# Altium PCB PCM2706 USB DAC Stick (Rev.5) Panel Single File.PcbDoc
Units mil, origin at the board's own origin, x right, y up, seen from the top; angles counter-clockwise.
Board outline 3937.01 x 3937.01 mil, 2 copper layers (Top Layer, Bottom Layer); 116 components, 0 nets, 372 pads, 80 vias.
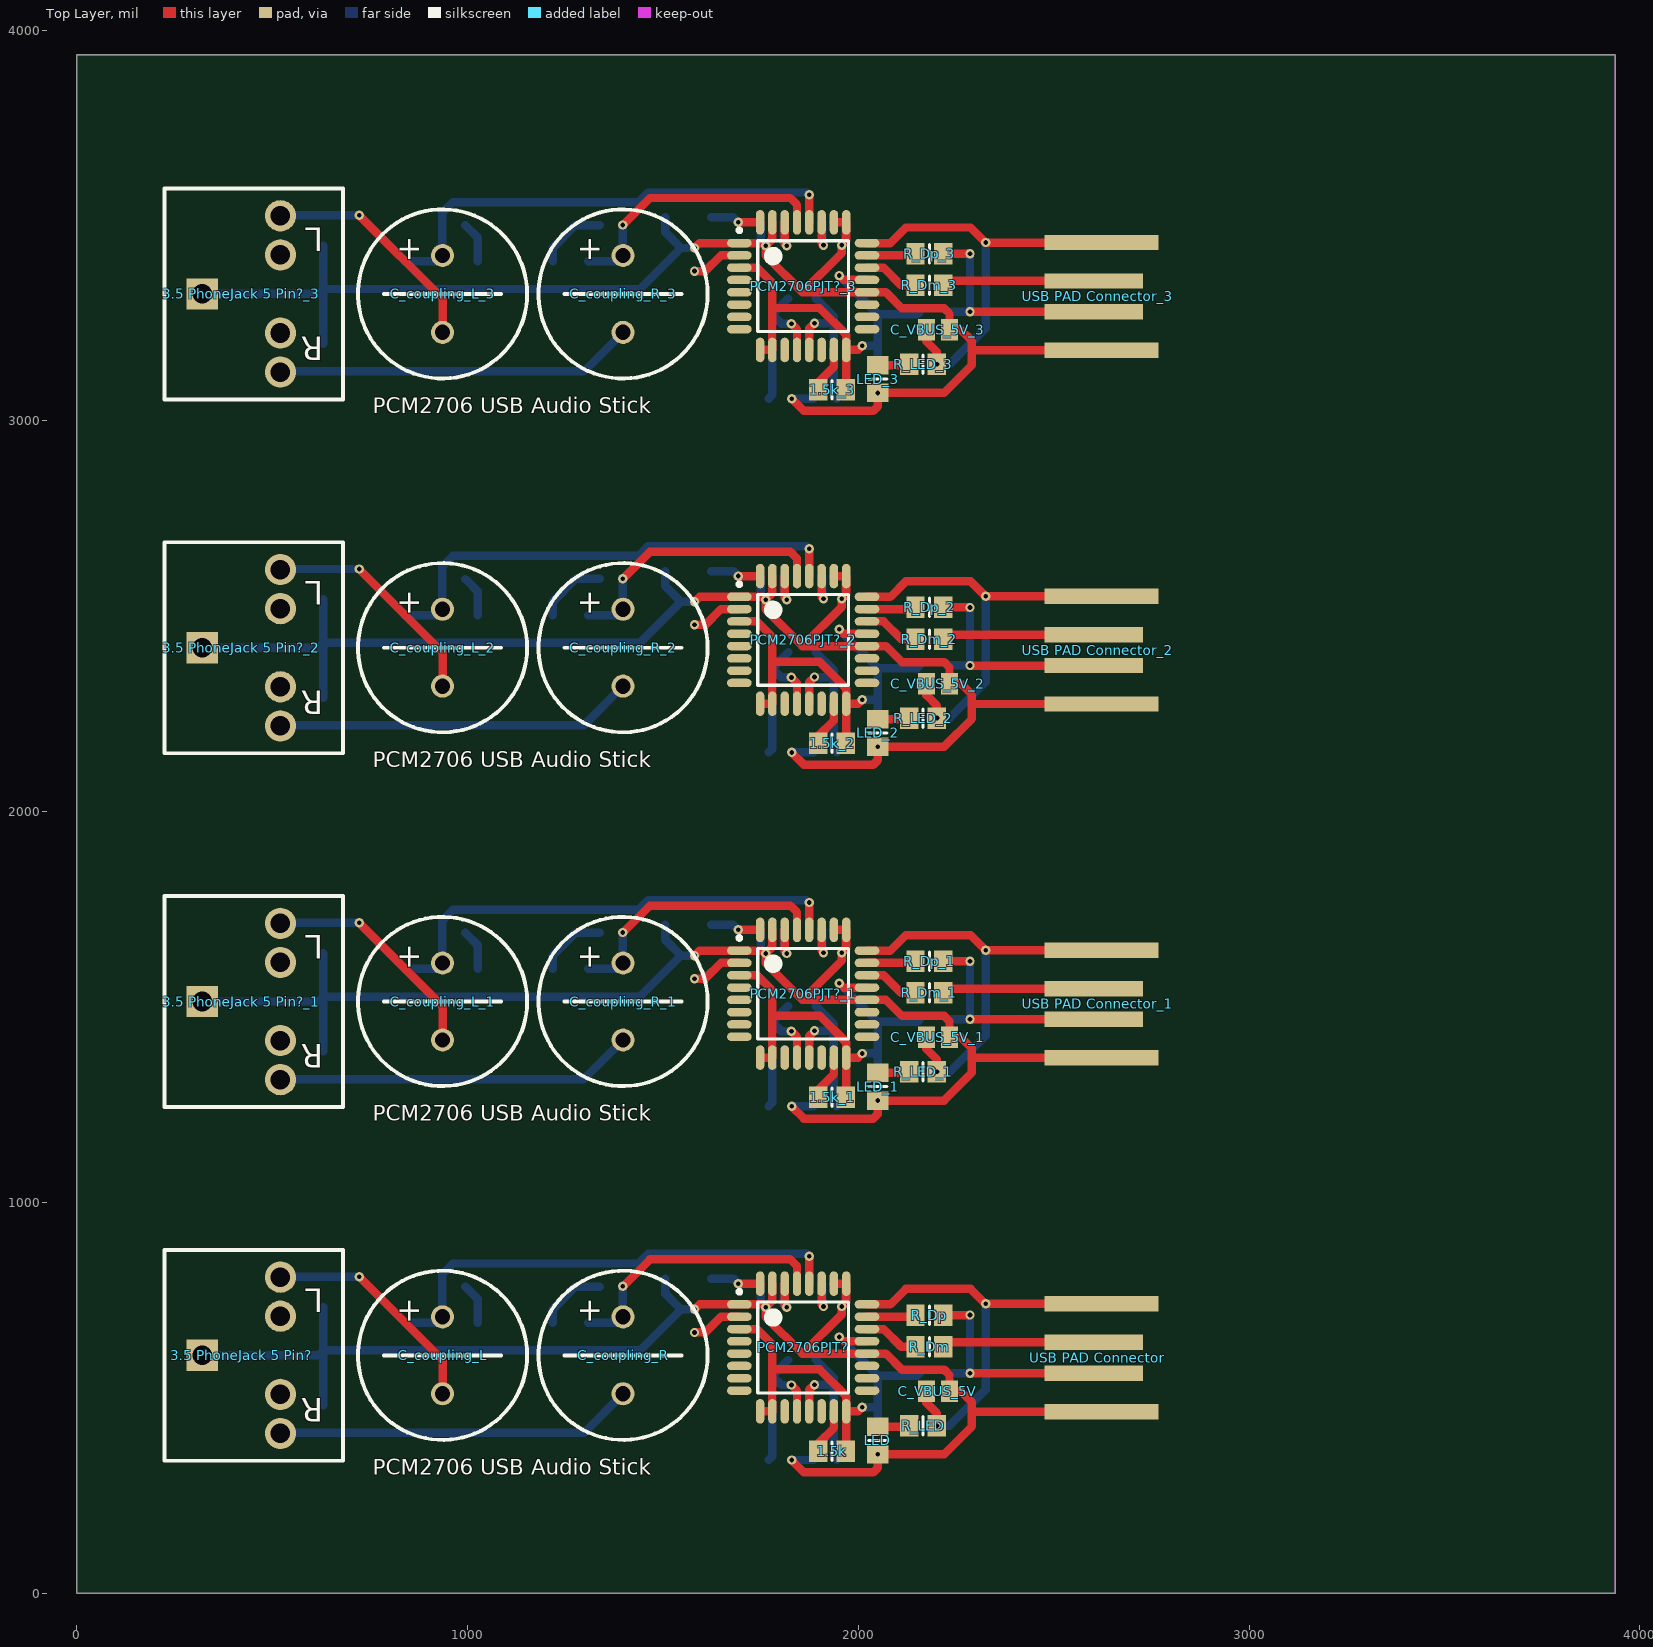
[diagram p0: Top Layer view]
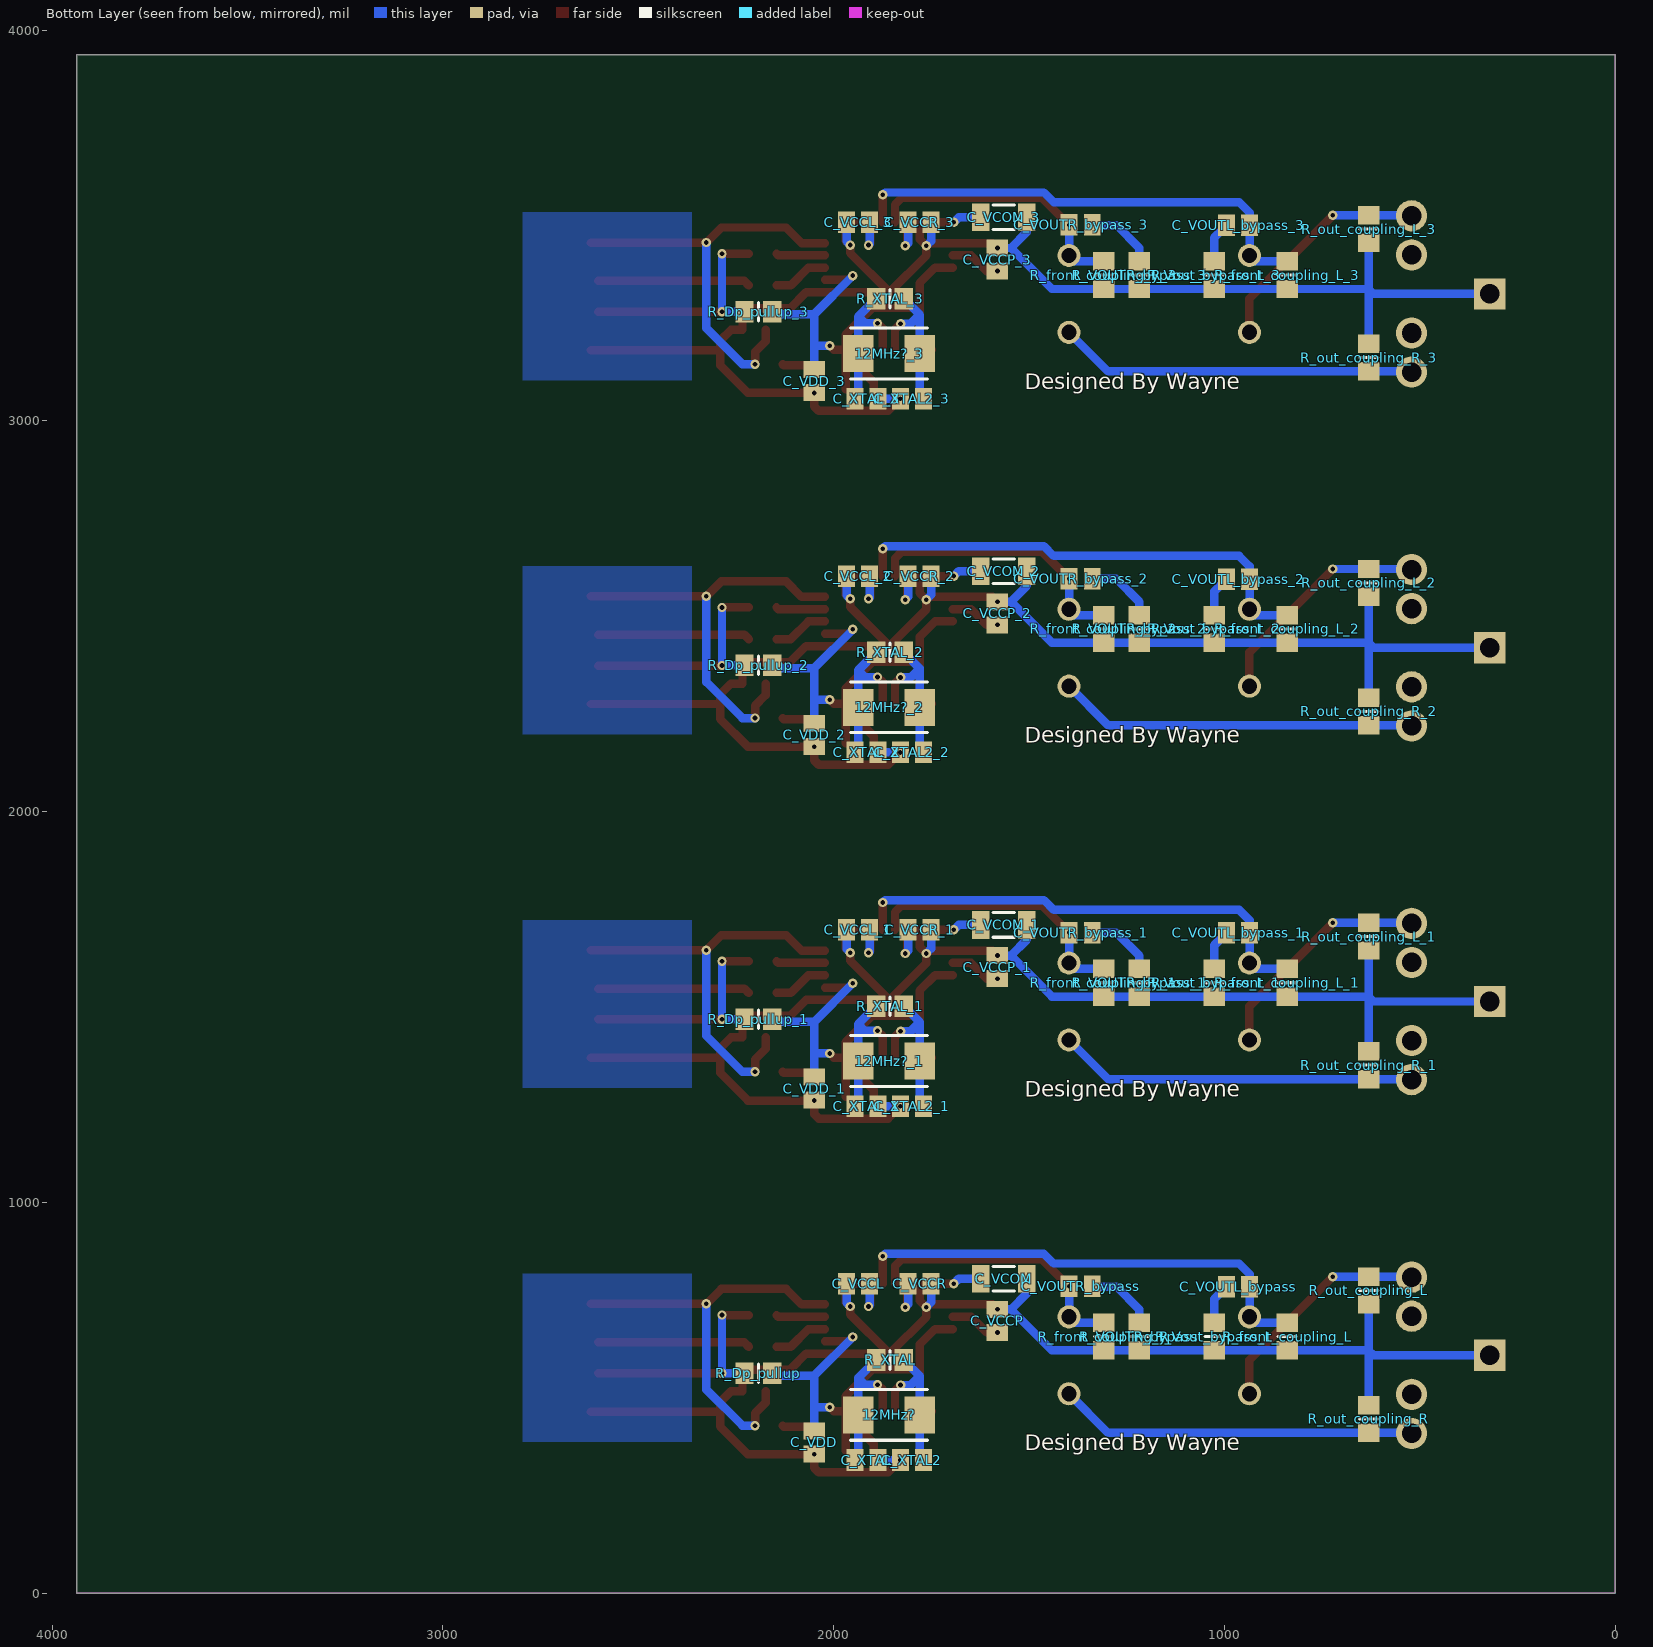
[diagram p1: Bottom Layer view, seen from below]

## Layer stack, top to bottom
Top Layer: signal copper 1.4
Dielectric: dielectric 12.6, FR-4, Dk 4.8
Bottom Layer: signal copper 1.4

## Board outline
0,0 0,3937.01 3937.01,3937.01 3937.01,0

## Design rules (kind name [scope] priority, off if disabled: settings)
Clearance [All] p1: gap=10
PolygonConnect [All] p1: connectstyle=Relief reliefconductorwidth=10 reliefentries=4 polygonreliefangle="90 Angle"
RoutingVias [All] p1: holewidth=28 width=50 viastyle="Through Hole" minholewidth=28 minwidth=50 maxholewidth=28 maxwidth=50
SilkscreenOverComponentPads [All] p1: minsilkscreentomaskgap=10
SolderMaskExpansion [All] p1: expansion=4
Width [All] p1: maxlimit=10 minlimit=10 preferedwidth=10
27 further rules are at their usual default settings.

## Components (designator, comment, footprint, x,y, rotation, side; value= is the part's Value field where it differs from the comment)
1.5k "R_DT_pullup" 6-0805_N 1932.85,363.66 r180 top
1.5k_1 "R_DT_pullup" 6-0805_N 1932.85,1269.17 r180 top (schematic designator 1.5k)
1.5k_2 "R_DT_pullup" 6-0805_N 1932.85,2174.68 r180 top (schematic designator 1.5k)
1.5k_3 "R_DT_pullup" 6-0805_N 1932.85,3080.2 r180 top (schematic designator 1.5k)
"3.5 PhoneJack 5 Pin?" "3.5 PhoneJack 5 Pin" "3.5 PHONEJACK 5 PIN" 320.85,608.66 r180 top
"3.5 PhoneJack 5 Pin?_1" "3.5 PhoneJack 5 Pin" "3.5 PHONEJACK 5 PIN" 320.85,1514.17 r180 top (schematic designator "3.5 PhoneJack 5 Pin?")
"3.5 PhoneJack 5 Pin?_2" "3.5 PhoneJack 5 Pin" "3.5 PHONEJACK 5 PIN" 320.85,2419.68 r180 top (schematic designator "3.5 PhoneJack 5 Pin?")
"3.5 PhoneJack 5 Pin?_3" "3.5 PhoneJack 5 Pin" "3.5 PHONEJACK 5 PIN" 320.85,3325.2 r180 top (schematic designator "3.5 PhoneJack 5 Pin?")
12MHz? "XTAL" CAPM5032X13N 2015.85,550.66 r0 bottom
12MHz?_1 "XTAL" CAPM5032X13N 2015.85,1456.17 r0 bottom (schematic designator 12MHz?)
12MHz?_2 "XTAL" CAPM5032X13N 2015.85,2361.68 r0 bottom (schematic designator 12MHz?)
12MHz?_3 "XTAL" CAPM5032X13N 2015.85,3267.2 r0 bottom (schematic designator 12MHz?)
C_coupling_L "Cap Pol1" "SOLID CAP (D)10MM" 935.85,608.66 r90 top
C_coupling_L_1 "Cap Pol1" "SOLID CAP (D)10MM" 935.85,1514.17 r90 top (schematic designator C_coupling_L)
C_coupling_L_2 "Cap Pol1" "SOLID CAP (D)10MM" 935.85,2419.68 r90 top (schematic designator C_coupling_L)
C_coupling_L_3 "Cap Pol1" "SOLID CAP (D)10MM" 935.85,3325.2 r90 top (schematic designator C_coupling_L)
C_coupling_R "Cap Pol1" "SOLID CAP (D)10MM" 1397.85,608.66 r90 top
C_coupling_R_1 "Cap Pol1" "SOLID CAP (D)10MM" 1397.85,1514.17 r90 top (schematic designator C_coupling_R)
C_coupling_R_2 "Cap Pol1" "SOLID CAP (D)10MM" 1397.85,2419.68 r90 top (schematic designator C_coupling_R)
C_coupling_R_3 "Cap Pol1" "SOLID CAP (D)10MM" 1397.85,3325.2 r90 top (schematic designator C_coupling_R)
C_VBUS_5V "" C0805 2203.85,516.66 r0 top
C_VBUS_5V_1 "" C0805 2203.85,1422.17 r0 top (schematic designator C_VBUS_5V)
C_VBUS_5V_2 "" C0805 2203.85,2327.68 r0 top (schematic designator C_VBUS_5V)
C_VBUS_5V_3 "" C0805 2203.85,3233.2 r0 top (schematic designator C_VBUS_5V)
C_VCCL "" C0805 1937.59,792.05 r0 bottom
C_VCCL_1 "" C0805 1937.59,1697.56 r0 bottom (schematic designator C_VCCL)
C_VCCL_2 "" C0805 1937.59,2603.07 r0 bottom (schematic designator C_VCCL)
C_VCCL_3 "" C0805 1937.59,3508.58 r0 bottom (schematic designator C_VCCL)
C_VCCP "" C0805 1580.85,696.66 r90 bottom
C_VCCP_1 "" C0805 1580.85,1602.17 r90 bottom (schematic designator C_VCCP)
C_VCCP_2 "" C0805 1580.85,2507.68 r90 bottom (schematic designator C_VCCP)
C_VCCP_3 "" C0805 1580.85,3413.2 r90 bottom (schematic designator C_VCCP)
C_VCCR "" C0805 1780.11,792.05 r180 bottom
C_VCCR_1 "" C0805 1780.11,1697.56 r180 bottom (schematic designator C_VCCR)
C_VCCR_2 "" C0805 1780.11,2603.07 r180 bottom (schematic designator C_VCCR)
C_VCCR_3 "" C0805 1780.11,3508.58 r180 bottom (schematic designator C_VCCR)
C_VCOM "" CAPC3216X12N 1564.85,804.66 r180 bottom
C_VCOM_1 "" CAPC3216X12N 1564.85,1710.17 r180 bottom (schematic designator C_VCOM)
C_VCOM_2 "" CAPC3216X12N 1564.85,2615.68 r180 bottom (schematic designator C_VCOM)
C_VCOM_3 "" CAPC3216X12N 1564.85,3521.2 r180 bottom (schematic designator C_VCOM)
C_VDD "" C0805 2049.85,385.66 r270 bottom
C_VDD_1 "" C0805 2049.85,1291.17 r270 bottom (schematic designator C_VDD)
C_VDD_2 "" C0805 2049.85,2196.68 r270 bottom (schematic designator C_VDD)
C_VDD_3 "" C0805 2049.85,3102.2 r270 bottom (schematic designator C_VDD)
C_VOUTL_bypass "" C0805 964.85,784.22 r0 bottom
C_VOUTL_bypass_1 "" C0805 964.85,1689.73 r0 bottom (schematic designator C_VOUTL_bypass)
C_VOUTL_bypass_2 "" C0805 964.85,2595.24 r0 bottom (schematic designator C_VOUTL_bypass)
C_VOUTL_bypass_3 "" C0805 964.85,3500.76 r0 bottom (schematic designator C_VOUTL_bypass)
C_VOUTR_bypass "" C0805 1367.85,785.22 r180 bottom
C_VOUTR_bypass_1 "" C0805 1367.85,1690.73 r180 bottom (schematic designator C_VOUTR_bypass)
C_VOUTR_bypass_2 "" C0805 1367.85,2596.24 r180 bottom (schematic designator C_VOUTR_bypass)
C_VOUTR_bypass_3 "" C0805 1367.85,3501.76 r180 bottom (schematic designator C_VOUTR_bypass)
C_XTAL "" C0805 1915.85,340.66 r180 bottom
C_XTAL2 "" C0805 1799.85,340.66 r0 bottom
C_XTAL2_1 "" C0805 1799.85,1246.17 r0 bottom (schematic designator C_XTAL2)
C_XTAL2_2 "" C0805 1799.85,2151.68 r0 bottom (schematic designator C_XTAL2)
C_XTAL2_3 "" C0805 1799.85,3057.2 r0 bottom (schematic designator C_XTAL2)
C_XTAL_1 "" C0805 1915.85,1246.17 r180 bottom (schematic designator C_XTAL)
C_XTAL_2 "" C0805 1915.85,2151.68 r180 bottom (schematic designator C_XTAL)
C_XTAL_3 "" C0805 1915.85,3057.2 r180 bottom (schematic designator C_XTAL)
LED "" 6-0805_N 2049.85,390.66 r270 top
LED_1 "" 6-0805_N 2049.85,1296.17 r270 top (schematic designator LED)
LED_2 "" 6-0805_N 2049.85,2201.68 r270 top (schematic designator LED)
LED_3 "" 6-0805_N 2049.85,3107.2 r270 top (schematic designator LED)
PCM2706PJT? "PCM2706PJT" TQFP80P900X900X120-32N 1858.85,628.66 r0 top
PCM2706PJT?_1 "PCM2706PJT" TQFP80P900X900X120-32N 1858.85,1534.17 r0 top (schematic designator PCM2706PJT?)
PCM2706PJT?_2 "PCM2706PJT" TQFP80P900X900X120-32N 1858.85,2439.68 r0 top (schematic designator PCM2706PJT?)
PCM2706PJT?_3 "PCM2706PJT" TQFP80P900X900X120-32N 1858.85,3345.2 r0 top (schematic designator PCM2706PJT?)
R_Dm "22" 6-0805_N 2181.85,630.66 r180 top
R_Dm_1 "22" 6-0805_N 2181.85,1536.17 r180 top (schematic designator R_Dm)
R_Dm_2 "22" 6-0805_N 2181.85,2441.68 r180 top (schematic designator R_Dm)
R_Dm_3 "22" 6-0805_N 2181.85,3347.2 r180 top (schematic designator R_Dm)
R_Dp "22" 6-0805_N 2181.85,711.66 r180 top
R_Dp_1 "22" 6-0805_N 2181.85,1617.17 r180 top (schematic designator R_Dp)
R_Dp_2 "22" 6-0805_N 2181.85,2522.68 r180 top (schematic designator R_Dp)
R_Dp_3 "22" 6-0805_N 2181.85,3428.2 r180 top (schematic designator R_Dp)
R_Dp_pullup "1.5k" 6-0805_N 2192.85,563.2 r0 bottom
R_Dp_pullup_1 "1.5k" 6-0805_N 2192.85,1468.72 r0 bottom (schematic designator R_Dp_pullup)
R_Dp_pullup_2 "1.5k" 6-0805_N 2192.85,2374.23 r0 bottom (schematic designator R_Dp_pullup)
R_Dp_pullup_3 "1.5k" 6-0805_N 2192.85,3279.74 r0 bottom (schematic designator R_Dp_pullup)
R_front_coupling_L "3.3k" 6-0805_N 838.85,656.66 r90 bottom
R_front_coupling_L_1 "3.3k" 6-0805_N 838.85,1562.17 r90 bottom (schematic designator R_front_coupling_L)
R_front_coupling_L_2 "3.3k" 6-0805_N 838.85,2467.68 r90 bottom (schematic designator R_front_coupling_L)
R_front_coupling_L_3 "3.3k" 6-0805_N 838.85,3373.2 r90 bottom (schematic designator R_front_coupling_L)
R_front_coupling_R "3.3k" 6-0805_N 1308.85,656.66 r90 bottom
R_front_coupling_R_1 "3.3k" 6-0805_N 1308.85,1562.17 r90 bottom (schematic designator R_front_coupling_R)
R_front_coupling_R_2 "3.3k" 6-0805_N 1308.85,2467.68 r90 bottom (schematic designator R_front_coupling_R)
R_front_coupling_R_3 "3.3k" 6-0805_N 1308.85,3373.2 r90 bottom (schematic designator R_front_coupling_R)
R_LED "330" 6-0805_N 2165.85,428.66 r180 top
R_LED_1 "330" 6-0805_N 2165.85,1334.17 r180 top (schematic designator R_LED)
R_LED_2 "330" 6-0805_N 2165.85,2239.68 r180 top (schematic designator R_LED)
R_LED_3 "330" 6-0805_N 2165.85,3145.2 r180 top (schematic designator R_LED)
R_out_coupling_L "3.3k" 6-0805_N 630.85,774.66 r90 bottom
R_out_coupling_L_1 "3.3k" 6-0805_N 630.85,1680.17 r90 bottom (schematic designator R_out_coupling_L)
R_out_coupling_L_2 "3.3k" 6-0805_N 630.85,2585.68 r90 bottom (schematic designator R_out_coupling_L)
R_out_coupling_L_3 "3.3k" 6-0805_N 630.85,3491.2 r90 bottom (schematic designator R_out_coupling_L)
R_out_coupling_R "3.3k" 6-0805_N 630.85,445.66 r270 bottom
R_out_coupling_R_1 "3.3k" 6-0805_N 630.85,1351.17 r270 bottom (schematic designator R_out_coupling_R)
R_out_coupling_R_2 "3.3k" 6-0805_N 630.85,2256.68 r270 bottom (schematic designator R_out_coupling_R)
R_out_coupling_R_3 "3.3k" 6-0805_N 630.85,3162.2 r270 bottom (schematic designator R_out_coupling_R)
R_Vout_bypass_L "16" 6-0805_N 1025.85,656.66 r270 bottom
R_Vout_bypass_L_1 "16" 6-0805_N 1025.85,1562.17 r270 bottom (schematic designator R_Vout_bypass_L)
R_Vout_bypass_L_2 "16" 6-0805_N 1025.85,2467.68 r270 bottom (schematic designator R_Vout_bypass_L)
R_Vout_bypass_L_3 "16" 6-0805_N 1025.85,3373.2 r270 bottom (schematic designator R_Vout_bypass_L)
R_VOUTR_bypass "16" 6-0805_N 1217.85,656.66 r90 bottom
R_VOUTR_bypass_1 "16" 6-0805_N 1217.85,1562.17 r90 bottom (schematic designator R_VOUTR_bypass)
R_VOUTR_bypass_2 "16" 6-0805_N 1217.85,2467.68 r90 bottom (schematic designator R_VOUTR_bypass)
R_VOUTR_bypass_3 "16" 6-0805_N 1217.85,3373.2 r90 bottom (schematic designator R_VOUTR_bypass)
R_XTAL "1M" 6-0805_N 1855.85,596.66 r180 bottom
R_XTAL_1 "1M" 6-0805_N 1855.85,1502.17 r180 bottom (schematic designator R_XTAL)
R_XTAL_2 "1M" 6-0805_N 1855.85,2407.68 r180 bottom (schematic designator R_XTAL)
R_XTAL_3 "1M" 6-0805_N 1855.85,3313.2 r180 bottom (schematic designator R_XTAL)
"USB PAD Connector" "USB PAD Connector" "USB A PAD CONNECTOR" 2816.85,838.66 r180 top
"USB PAD Connector_1" "USB PAD Connector" "USB A PAD CONNECTOR" 2816.85,1744.17 r180 top (schematic designator "USB PAD Connector")
"USB PAD Connector_2" "USB PAD Connector" "USB A PAD CONNECTOR" 2816.85,2649.68 r180 top (schematic designator "USB PAD Connector")
"USB PAD Connector_3" "USB PAD Connector" "USB A PAD CONNECTOR" 2816.85,3555.2 r180 top (schematic designator "USB PAD Connector")

## Footprints (in the part's own frame and the unit in brackets; to place one, negate y for a bottom-side part, rotate by r counter-clockwise, add the part's x,y. Pads: shape width x height; smd on the part's side, far side on the other; paste and mask are expansions set on the pad)
"3.5 PHONEJACK 5 PIN" [mil] "3.5 PhoneJack 5 Pin"
  rect 80x80 hole 50: COM(0,0)
  round 80 hole 50: L_NC(-200,-100) L_NO(-200,-200) R_NC(-200,100) R_NO(-200,200)
  silkscreen extent -360,-270 97,270
6-0805_N [mm] "Chip Resistor, Body 2.0x1.2mm, IPC Medium Density"
  rect 1.2x1.4 smd: 1(-0.9,0) 2(0.9,0)
  silkscreen extent 0,-0.6 0,0.6, body extent -1.07,-0.7 1.07,0.7, height 0.7
C0805 [mm] "Chip Capacitor, Body 2.0x1.3mm, IPC High Density"
  rect 1.1x1.4 smd: 1(-0.75,0) 2(0.75,0)
  body extent -1.1,-0.72 1.1,0.72, height 1.4
CAPC3216X12N [mm] "Chip Capacitor, 2-Leads, Body 3.2x1.6mm, IPC Medium Density"
  rect 1.15x1.8 smd: 1(-1.5,0) 2(1.5,0)
  silkscreen extent -0.7,-0.8 0.7,0.8, body extent -1.6,-0.8 1.6,0.8, height 1.25
CAPM5032X13N [mm] "Molded Capacitor, 2-Leads, Body 5.0x3.2mm, IPC Medium Density"
  rect 2x2.4 smd: 1(-6,2.4) 2(-2,2.4)
  silkscreen extent -6.5,0.75 -1.5,4.05, body extent -6.5,0.8 -1.5,4, height 1.3
"SOLID CAP (D)10MM" [mm] "Capacitor (Radial); 2 Leads"
  round 1.5 hole 1: 1(2.5,0) 2(-2.5,0)
  silkscreen extent -5.5,-5.5 5.5,5.5
TQFP80P900X900X120-32N [mm] "TQFP, 32-Leads, Body 9.0x9.0mm (max), Pitch 0.80mm, IPC Medium Density"
  oval 1.6x0.55 smd: 1(-4.15,2.8) 2(-4.15,2) 3(-4.15,1.2) 4(-4.15,0.4) 5(-4.15,-0.4) 6(-4.15,-1.2) 7(-4.15,-2) 8(-4.15,-2.8) 17(4.15,-2.8) 18(4.15,-2) 19(4.15,-1.2) 20(4.15,-0.4) 21(4.15,0.4) 22(4.15,1.2) 23(4.15,2) 24(4.15,2.8)
  oval 0.55x1.6 smd: 9(-2.8,-4.15) 10(-2,-4.15) 11(-1.2,-4.15) 12(-0.4,-4.15) 13(0.4,-4.15) 14(1.2,-4.15) 15(2,-4.15) 16(2.8,-4.15) 25(2.8,4.15) 26(2,4.15) 27(1.2,4.15) 28(0.4,4.15) 29(-0.4,4.15) 30(-1.2,4.15) 31(-2,4.15) 32(-2.8,4.15)
  silkscreen extent -4.27,-2.95 2.95,3.75, body extent -3.5,-3.5 3.5,3.5, height 1.2
"USB A PAD CONNECTOR" [mm]
  rect 6.41x1 smd: D+(5.445,7) D-(5.445,5)
  rect 7.41x1 smd: Gnd(4.945,9.5) Vbus(4.945,2.5)

## Part data
1.5k 1.5k_1 1.5k_2 1.5k_3 R_Dm R_Dm_1 R_Dm_2 R_Dm_3 R_Dp R_Dp_1 R_Dp_2 R_Dp_3 R_Dp_pullup R_Dp_pullup_1 R_Dp_pullup_2 R_Dp_pullup_3 R_front_coupling_L R_front_coupling_L_1 R_front_coupling_L_2 R_front_coupling_L_3 R_front_coupling_R R_front_coupling_R_1 R_front_coupling_R_2 R_front_coupling_R_3 R_LED R_LED_1 R_LED_2 R_LED_3 R_out_coupling_L R_out_coupling_L_1 R_out_coupling_L_2 R_out_coupling_L_3 R_out_coupling_R R_out_coupling_R_1 R_out_coupling_R_2 R_out_coupling_R_3 R_Vout_bypass_L R_Vout_bypass_L_1 R_Vout_bypass_L_2 R_Vout_bypass_L_3 R_VOUTR_bypass R_VOUTR_bypass_1 R_VOUTR_bypass_2 R_VOUTR_bypass_3 R_XTAL R_XTAL_1 R_XTAL_2 R_XTAL_3: library part "Res Thermal", "Thermistor"
12MHz? 12MHz?_1 12MHz?_2 12MHz?_3: "Crystal Oscillator"
C_coupling_L C_coupling_L_1 C_coupling_L_2 C_coupling_L_3 C_coupling_R C_coupling_R_1 C_coupling_R_2 C_coupling_R_3: "Polarized Capacitor (Radial)"
C_VBUS_5V C_VBUS_5V_1 C_VBUS_5V_2 C_VBUS_5V_3 C_VCCL C_VCCL_1 C_VCCL_2 C_VCCL_3 C_VCCP C_VCCP_1 C_VCCP_2 C_VCCP_3 C_VCCR C_VCCR_1 C_VCCR_2 C_VCCR_3 C_VCOM C_VCOM_1 C_VCOM_2 C_VCOM_3 C_VDD C_VDD_1 C_VDD_2 C_VDD_3 C_VOUTL_bypass C_VOUTL_bypass_1 C_VOUTL_bypass_2 C_VOUTL_bypass_3 C_VOUTR_bypass C_VOUTR_bypass_1 C_VOUTR_bypass_2 C_VOUTR_bypass_3 C_XTAL C_XTAL2 C_XTAL2_1 C_XTAL2_2 C_XTAL2_3 C_XTAL_1 C_XTAL_2 C_XTAL_3: library part "Cap Pol3", "Polarized Capacitor (Surface Mount)"
LED LED_1 LED_2 LED_3: library part LED2, "Typical RED, GREEN, YELLOW, AMBER GaAs LED"

## Via types
v1: diameter 24, hole 12, Top Layer to Bottom Layer, 80 vias

## Nets (pads, with @x,y where several pads share a name; then routed paths per layer and width w, separated by ;. In a path a pad name is that pad's centre, name@x,y a point inside that pad or via, vN(x,y) a via of type N, cw(c..) or ccw(c..) an arc to the next point about the centre after c; other vN are vias at no path point)
pads on no net: 1.5k.1 1.5k.2 1.5k_1.1 1.5k_1.2 1.5k_2.1 1.5k_2.2 1.5k_3.1 1.5k_3.2 12MHz?.1 12MHz?.2 12MHz?_1.1 12MHz?_1.2 12MHz?_2.1 12MHz?_2.2 12MHz?_3.1 12MHz?_3.2 "3.5 PhoneJack 5 Pin?.COM" "3.5 PhoneJack 5 Pin?.L_NC" "3.5 PhoneJack 5 Pin?.L_NO" "3.5 PhoneJack 5 Pin?.R_NC" "3.5 PhoneJack 5 Pin?.R_NO" "3.5 PhoneJack 5 Pin?_1.COM" "3.5 PhoneJack 5 Pin?_1.L_NC" "3.5 PhoneJack 5 Pin?_1.L_NO" "3.5 PhoneJack 5 Pin?_1.R_NC" "3.5 PhoneJack 5 Pin?_1.R_NO" "3.5 PhoneJack 5 Pin?_2.COM" "3.5 PhoneJack 5 Pin?_2.L_NC" "3.5 PhoneJack 5 Pin?_2.L_NO" "3.5 PhoneJack 5 Pin?_2.R_NC" "3.5 PhoneJack 5 Pin?_2.R_NO" "3.5 PhoneJack 5 Pin?_3.COM" "3.5 PhoneJack 5 Pin?_3.L_NC" "3.5 PhoneJack 5 Pin?_3.L_NO" "3.5 PhoneJack 5 Pin?_3.R_NC" "3.5 PhoneJack 5 Pin?_3.R_NO" "USB PAD Connector.D+" "USB PAD Connector.D-" "USB PAD Connector.Gnd" "USB PAD Connector.Vbus" "USB PAD Connector_1.D+" "USB PAD Connector_1.D-" "USB PAD Connector_1.Gnd" "USB PAD Connector_1.Vbus" "USB PAD Connector_2.D+" "USB PAD Connector_2.D-" "USB PAD Connector_2.Gnd" "USB PAD Connector_2.Vbus" "USB PAD Connector_3.D+" "USB PAD Connector_3.D-" "USB PAD Connector_3.Gnd" "USB PAD Connector_3.Vbus" C_coupling_L.1 C_coupling_L.2 C_coupling_L_1.1 C_coupling_L_1.2 C_coupling_L_2.1 C_coupling_L_2.2 C_coupling_L_3.1 C_coupling_L_3.2 C_coupling_R.1 C_coupling_R.2 C_coupling_R_1.1 C_coupling_R_1.2 C_coupling_R_2.1 C_coupling_R_2.2 C_coupling_R_3.1 C_coupling_R_3.2 C_VBUS_5V.1 C_VBUS_5V.2 C_VBUS_5V_1.1 C_VBUS_5V_1.2 C_VBUS_5V_2.1 C_VBUS_5V_2.2 C_VBUS_5V_3.1 C_VBUS_5V_3.2 C_VCCL.1 C_VCCL.2 C_VCCL_1.1 C_VCCL_1.2 C_VCCL_2.1 C_VCCL_2.2 C_VCCL_3.1 C_VCCL_3.2 C_VCCP.1 C_VCCP.2 C_VCCP_1.1 C_VCCP_1.2 C_VCCP_2.1 C_VCCP_2.2 C_VCCP_3.1 C_VCCP_3.2 C_VCCR.1 C_VCCR.2 C_VCCR_1.1 C_VCCR_1.2 C_VCCR_2.1 C_VCCR_2.2 C_VCCR_3.1 C_VCCR_3.2 C_VCOM.1 C_VCOM.2 C_VCOM_1.1 C_VCOM_1.2 C_VCOM_2.1 C_VCOM_2.2 C_VCOM_3.1 C_VCOM_3.2 C_VDD.1 C_VDD.2 C_VDD_1.1 C_VDD_1.2 C_VDD_2.1 C_VDD_2.2 C_VDD_3.1 C_VDD_3.2 C_VOUTL_bypass.1 C_VOUTL_bypass.2 C_VOUTL_bypass_1.1 C_VOUTL_bypass_1.2 C_VOUTL_bypass_2.1 C_VOUTL_bypass_2.2 C_VOUTL_bypass_3.1 C_VOUTL_bypass_3.2 C_VOUTR_bypass.1 C_VOUTR_bypass.2 C_VOUTR_bypass_1.1 C_VOUTR_bypass_1.2 C_VOUTR_bypass_2.1 C_VOUTR_bypass_2.2 C_VOUTR_bypass_3.1 C_VOUTR_bypass_3.2 C_XTAL2.1 C_XTAL2.2 C_XTAL2_1.1 C_XTAL2_1.2 C_XTAL2_2.1 C_XTAL2_2.2 C_XTAL2_3.1 C_XTAL2_3.2 C_XTAL.1 C_XTAL.2 C_XTAL_1.1 C_XTAL_1.2 C_XTAL_2.1 C_XTAL_2.2 C_XTAL_3.1 C_XTAL_3.2 LED.1 LED.2 LED_1.1 LED_1.2 LED_2.1 LED_2.2 LED_3.1 LED_3.2 PCM2706PJT?.1 PCM2706PJT?.2 PCM2706PJT?.3 PCM2706PJT?.4 PCM2706PJT?.5 PCM2706PJT?.6 PCM2706PJT?.7 PCM2706PJT?.8 PCM2706PJT?.9 PCM2706PJT?.10 PCM2706PJT?.11 PCM2706PJT?.12 PCM2706PJT?.13 PCM2706PJT?.14 PCM2706PJT?.15 PCM2706PJT?.16 PCM2706PJT?.17 PCM2706PJT?.18 PCM2706PJT?.19 PCM2706PJT?.20 PCM2706PJT?.21 PCM2706PJT?.22 PCM2706PJT?.23 PCM2706PJT?.24 PCM2706PJT?.25 PCM2706PJT?.26 PCM2706PJT?.27 PCM2706PJT?.28 PCM2706PJT?.29 PCM2706PJT?.30 PCM2706PJT?.31 PCM2706PJT?.32 PCM2706PJT?_1.1 PCM2706PJT?_1.2 PCM2706PJT?_1.3 PCM2706PJT?_1.4 PCM2706PJT?_1.5 PCM2706PJT?_1.6 PCM2706PJT?_1.7 PCM2706PJT?_1.8 PCM2706PJT?_1.9 PCM2706PJT?_1.10 PCM2706PJT?_1.11 PCM2706PJT?_1.12 PCM2706PJT?_1.13 PCM2706PJT?_1.14 PCM2706PJT?_1.15 PCM2706PJT?_1.16 PCM2706PJT?_1.17 PCM2706PJT?_1.18 PCM2706PJT?_1.19 PCM2706PJT?_1.20 PCM2706PJT?_1.21 PCM2706PJT?_1.22 PCM2706PJT?_1.23 PCM2706PJT?_1.24 PCM2706PJT?_1.25 PCM2706PJT?_1.26 PCM2706PJT?_1.27 PCM2706PJT?_1.28 PCM2706PJT?_1.29 PCM2706PJT?_1.30 PCM2706PJT?_1.31 PCM2706PJT?_1.32 PCM2706PJT?_2.1 PCM2706PJT?_2.2 PCM2706PJT?_2.3 PCM2706PJT?_2.4 PCM2706PJT?_2.5 PCM2706PJT?_2.6 PCM2706PJT?_2.7 PCM2706PJT?_2.8 PCM2706PJT?_2.9 PCM2706PJT?_2.10 PCM2706PJT?_2.11 PCM2706PJT?_2.12 PCM2706PJT?_2.13 PCM2706PJT?_2.14 PCM2706PJT?_2.15 PCM2706PJT?_2.16 PCM2706PJT?_2.17 PCM2706PJT?_2.18 PCM2706PJT?_2.19 PCM2706PJT?_2.20 PCM2706PJT?_2.21 PCM2706PJT?_2.22 PCM2706PJT?_2.23 PCM2706PJT?_2.24 PCM2706PJT?_2.25 PCM2706PJT?_2.26 PCM2706PJT?_2.27 PCM2706PJT?_2.28 PCM2706PJT?_2.29 PCM2706PJT?_2.30 PCM2706PJT?_2.31 PCM2706PJT?_2.32 PCM2706PJT?_3.1 PCM2706PJT?_3.2 PCM2706PJT?_3.3 PCM2706PJT?_3.4 PCM2706PJT?_3.5 PCM2706PJT?_3.6 PCM2706PJT?_3.7 PCM2706PJT?_3.8 PCM2706PJT?_3.9 PCM2706PJT?_3.10 PCM2706PJT?_3.11 PCM2706PJT?_3.12 PCM2706PJT?_3.13 PCM2706PJT?_3.14 PCM2706PJT?_3.15 PCM2706PJT?_3.16 PCM2706PJT?_3.17 PCM2706PJT?_3.18 PCM2706PJT?_3.19 PCM2706PJT?_3.20 PCM2706PJT?_3.21 PCM2706PJT?_3.22 PCM2706PJT?_3.23 PCM2706PJT?_3.24 PCM2706PJT?_3.25 PCM2706PJT?_3.26 PCM2706PJT?_3.27 PCM2706PJT?_3.28 PCM2706PJT?_3.29 PCM2706PJT?_3.30 PCM2706PJT?_3.31 PCM2706PJT?_3.32 R_Dm.1 R_Dm.2 R_Dm_1.1 R_Dm_1.2 R_Dm_2.1 R_Dm_2.2 R_Dm_3.1 R_Dm_3.2 R_Dp.1 R_Dp.2 R_Dp_1.1 R_Dp_1.2 R_Dp_2.1 R_Dp_2.2 R_Dp_3.1 R_Dp_3.2 R_Dp_pullup.1 R_Dp_pullup.2 R_Dp_pullup_1.1 R_Dp_pullup_1.2 R_Dp_pullup_2.1 R_Dp_pullup_2.2 R_Dp_pullup_3.1 R_Dp_pullup_3.2 R_front_coupling_L.1 R_front_coupling_L.2 R_front_coupling_L_1.1 R_front_coupling_L_1.2 R_front_coupling_L_2.1 R_front_coupling_L_2.2 R_front_coupling_L_3.1 R_front_coupling_L_3.2 R_front_coupling_R.1 R_front_coupling_R.2 R_front_coupling_R_1.1 R_front_coupling_R_1.2 R_front_coupling_R_2.1 R_front_coupling_R_2.2 R_front_coupling_R_3.1 R_front_coupling_R_3.2 R_LED.1 R_LED.2 R_LED_1.1 R_LED_1.2 R_LED_2.1 R_LED_2.2 R_LED_3.1 R_LED_3.2 R_out_coupling_L.1 R_out_coupling_L.2 R_out_coupling_L_1.1 R_out_coupling_L_1.2 R_out_coupling_L_2.1 R_out_coupling_L_2.2 R_out_coupling_L_3.1 R_out_coupling_L_3.2 R_out_coupling_R.1 R_out_coupling_R.2 R_out_coupling_R_1.1 R_out_coupling_R_1.2 R_out_coupling_R_2.1 R_out_coupling_R_2.2 R_out_coupling_R_3.1 R_out_coupling_R_3.2 R_Vout_bypass_L.1 R_Vout_bypass_L.2 R_Vout_bypass_L_1.1 R_Vout_bypass_L_1.2 R_Vout_bypass_L_2.1 R_Vout_bypass_L_2.2 R_Vout_bypass_L_3.1 R_Vout_bypass_L_3.2 R_VOUTR_bypass.1 R_VOUTR_bypass.2 R_VOUTR_bypass_1.1 R_VOUTR_bypass_1.2 R_VOUTR_bypass_2.1 R_VOUTR_bypass_2.2 R_VOUTR_bypass_3.1 R_VOUTR_bypass_3.2 R_XTAL.1 R_XTAL.2 R_XTAL_1.1 R_XTAL_1.2 R_XTAL_2.1 R_XTAL_2.2 R_XTAL_3.1 R_XTAL_3.2
copper on no net: | length 51132.5
  Top Layer w21.65: v1(722.42,810.09) 935.85,596.66 935.85,510.23 ; v1(722.42,1715.61) 935.85,1502.17 935.85,1415.75 ; v1(722.42,2621.12) 935.85,2407.68 935.85,2321.26 ; v1(722.42,3526.63) 935.85,3313.2 935.85,3226.77 ; v1(1397.38,785.22) 1466.38,854.22 1826.29,854.22 1843.1,837.41 1843.1,792.05 ; v1(1397.38,1690.73) 1466.38,1759.73 1826.29,1759.73 1843.1,1742.92 1843.1,1697.56 ; v1(1397.38,2596.24) 1466.38,2665.24 1826.29,2665.24 1843.1,2648.43 1843.1,2603.07 ; v1(1397.38,3501.76) 1466.38,3570.76 1826.29,3570.76 1843.1,3553.94 1843.1,3508.58 ; v1(1580.85,667.13) 1608.32,667.13 1648.59,707.4 1695.46,707.4 ; v1(1580.85,726.19) 1593.56,738.9 1695.46,738.9 1755.61,738.9 v1(1762.85,731.66) ; v1(1580.85,1572.64) 1608.32,1572.64 1648.59,1612.91 1695.46,1612.91 ; v1(1580.85,1631.7) 1593.56,1644.41 1695.46,1644.41 1755.61,1644.41 v1(1762.85,1637.17) ; v1(1580.85,2478.16) 1608.32,2478.16 1648.59,2518.42 1695.46,2518.42 ; v1(1580.85,2537.21) 1593.56,2549.92 1695.46,2549.92 1755.61,2549.92 v1(1762.85,2542.68) ; v1(1580.85,3383.67) 1608.32,3383.67 1648.59,3423.94 1695.46,3423.94 ; v1(1580.85,3442.72) 1593.56,3455.43 1695.46,3455.43 1755.61,3455.43 v1(1762.85,3448.2) ; v1(1692.46,792.05) 1748.61,792.05 ; v1(1692.46,1697.56) 1748.61,1697.56 ; v1(1692.46,2603.07) 1748.61,2603.07 ; v1(1692.46,3508.58) 1748.61,3508.58 ; 1695.46,675.9 1740.61,675.9 1780.11,636.4 1780.11,465.27 1748.61,465.27 ; 1695.46,1581.42 1740.61,1581.42 1780.11,1541.91 1780.11,1370.79 1748.61,1370.79 ; 1695.46,2486.93 1740.61,2486.93 1780.11,2447.42 1780.11,2276.3 1748.61,2276.3 ; 1695.46,3392.44 1740.61,3392.44 1780.11,3352.94 1780.11,3181.81 1748.61,3181.81 ; 1780.11,572.66 1900.85,572.66 1969.09,504.42 1969.09,465.27 ; 1780.11,792.05 1780.11,748.92 v1(1762.85,731.66) ; 1780.11,1478.17 1900.85,1478.17 1969.09,1409.94 1969.09,1370.79 ; 1780.11,1697.56 1780.11,1654.43 v1(1762.85,1637.17) ; 1780.11,2383.68 1900.85,2383.68 1969.09,2315.45 1969.09,2276.3 ; 1780.11,2603.07 1780.11,2559.94 v1(1762.85,2542.68) ; 1780.11,3289.2 1900.85,3289.2 1969.09,3220.96 1969.09,3181.81 ; 1780.11,3508.58 1780.11,3465.46 v1(1762.85,3448.2) ; 1811.61,792.05 1811.61,736.9 v1(1816.85,731.66) ; 1811.61,1697.56 1811.61,1642.42 v1(1816.85,1637.17) ; 1811.61,2603.07 1811.61,2547.93 v1(1816.85,2542.68) ; 1811.61,3508.58 1811.61,3453.44 v1(1816.85,3448.2) ; v1(1828.85,532.66) 1843.1,518.41 1843.1,465.27 ; v1(1828.85,1438.17) 1843.1,1423.92 1843.1,1370.79 ; v1(1828.85,2343.68) 1843.1,2329.43 1843.1,2276.3 ; v1(1828.85,3249.2) 1843.1,3234.94 1843.1,3181.81 ; v1(1829.38,340.66) 1860.87,309.16 2038.35,309.16 2049.85,320.66 v1(2049.85,355.23) 2219.42,355.23 2290.85,426.66 2290.85,464.64 ; v1(1829.38,1246.17) 1860.87,1214.68 2038.35,1214.68 2049.85,1226.17 v1(2049.85,1260.74) 2219.42,1260.74 2290.85,1332.17 2290.85,1370.16 ; v1(1829.38,2151.68) 1860.87,2120.19 2038.35,2120.19 2049.85,2131.68 v1(2049.85,2166.25) 2219.42,2166.25 2290.85,2237.68 2290.85,2275.67 ; v1(1829.38,3057.2) 1860.87,3025.7 2038.35,3025.7 2049.85,3037.2 v1(2049.85,3071.76) 2219.42,3071.76 2290.85,3143.2 2290.85,3181.18 ; 1874.6,465.27 1874.6,520.41 v1(1887.85,533.66) ; 1874.6,792.05 v1(1874.6,862.22) ; 1874.6,1370.79 1874.6,1425.92 v1(1887.85,1439.17) ; 1874.6,1697.56 v1(1874.6,1767.73) ; 1874.6,2276.3 1874.6,2331.43 v1(1887.85,2344.68) ; 1874.6,2603.07 v1(1874.6,2673.24) ; 1874.6,3181.81 1874.6,3236.94 v1(1887.85,3250.2) ; 1874.6,3508.58 v1(1874.6,3578.76) ; 1897.42,369.19 1897.42,382.23 1937.59,422.4 1937.59,465.27 ; 1897.42,1274.7 1897.42,1287.74 1937.59,1327.91 1937.59,1370.79 ; 1897.42,2180.21 1897.42,2193.25 1937.59,2233.42 1937.59,2276.3 ; 1897.42,3085.72 1897.42,3098.76 1937.59,3138.94 1937.59,3181.81 ; 1906.09,792.05 1906.09,738.42 v1(1910.85,733.66) ; 1906.09,1697.56 1906.09,1643.93 v1(1910.85,1639.17) ; 1906.09,2603.07 1906.09,2549.44 v1(1910.85,2544.68) ; 1906.09,3508.58 1906.09,3454.95 v1(1910.85,3450.2) ; 1937.59,792.05 1969.09,792.05 1969.09,744.9 v1(1957.85,733.66) 1957.85,713.66 1857.1,612.91 ; 1937.59,1697.56 1969.09,1697.56 1969.09,1650.41 v1(1957.85,1639.17) 1957.85,1619.17 1857.1,1518.42 ; 1937.59,2603.07 1969.09,2603.07 1969.09,2555.92 v1(1957.85,2544.68) 1957.85,2524.68 1857.1,2423.94 ; 1937.59,3508.58 1969.09,3508.58 1969.09,3461.43 v1(1957.85,3450.2) 1957.85,3430.2 1857.1,3329.45 ; v1(1950.85,655.66) 1962.1,644.41 2022.24,644.41 ; v1(1950.85,1561.17) 1962.1,1549.92 2022.24,1549.92 ; v1(1950.85,2466.68) 1962.1,2455.43 2022.24,2455.43 ; v1(1950.85,3372.2) 1962.1,3360.94 2022.24,3360.94 ; 1969.09,364.46 1969.09,465.27 ; 1969.09,1269.98 1969.09,1370.79 ; 1969.09,2175.49 1969.09,2276.3 ; 1969.09,3081 1969.09,3181.81 ; v1(2009.85,475.66) 1999.46,465.27 1969.09,465.27 ; v1(2009.85,1381.17) 1999.46,1370.79 1969.09,1370.79 ; v1(2009.85,2286.68) 1999.46,2276.3 1969.09,2276.3 ; v1(2009.85,3192.2) 1999.46,3181.81 1969.09,3181.81 ; 2022.24,675.9 2064.61,675.9 2109.85,630.66 2146.42,630.66 ; 2022.24,707.4 2142.16,707.4 2146.42,711.66 ; 2022.24,738.9 2082.09,738.9 2121.85,778.66 2287.42,778.66 v1@2325.85,740.23 ; 2022.24,1581.42 2064.61,1581.42 2109.85,1536.17 2146.42,1536.17 ; 2022.24,1612.91 2142.16,1612.91 2146.42,1617.17 ; 2022.24,1644.41 2082.09,1644.41 2121.85,1684.17 2287.42,1684.17 v1@2325.85,1645.75 ; 2022.24,2486.93 2064.61,2486.93 2109.85,2441.68 2146.42,2441.68 ; 2022.24,2518.42 2142.16,2518.42 2146.42,2522.68 ; 2022.24,2549.92 2082.09,2549.92 2121.85,2589.68 2287.42,2589.68 v1@2325.85,2551.26 ; 2022.24,3392.44 2064.61,3392.44 2109.85,3347.2 2146.42,3347.2 ; 2022.24,3423.94 2142.16,3423.94 2146.42,3428.2 ; 2022.24,3455.43 2082.09,3455.43 2121.85,3495.2 2287.42,3495.2 v1@2325.85,3456.77 ; 2049.85,426.09 2127.85,426.09 2130.42,428.66 ; 2049.85,1331.6 2127.85,1331.6 2130.42,1334.17 ; 2049.85,2237.12 2127.85,2237.12 2130.42,2239.68 ; 2049.85,3142.63 2127.85,3142.63 2130.42,3145.2 ; 2174.32,516.66 2174.32,487.19 2201.28,460.23 v1(2201.28,428.66) ; 2174.32,1422.17 2174.32,1392.7 2201.28,1365.74 v1(2201.28,1334.17) ; 2174.32,2327.68 2174.32,2298.21 2201.28,2271.25 v1(2201.28,2239.68) ; 2174.32,3233.2 2174.32,3203.72 2201.28,3176.76 v1(2201.28,3145.2) ; 2217.28,630.66 2228.43,641.81 2602.48,641.81 ; 2217.28,711.66 v1(2285.85,711.66) ; 2217.28,1536.17 2228.43,1547.32 2602.48,1547.32 ; 2217.28,1617.17 v1(2285.85,1617.17) ; 2217.28,2441.68 2228.43,2452.83 2602.48,2452.83 ; 2217.28,2522.68 v1(2285.85,2522.68) ; 2217.28,3347.2 2228.43,3358.35 2602.48,3358.35 ; 2217.28,3428.2 v1(2285.85,3428.2) ; v1(2285.98,563.07) 2602.48,563.07 ; v1(2285.98,1468.58) 2602.48,1468.58 ; v1(2285.98,2374.09) 2602.48,2374.09 ; v1(2285.98,3279.61) 2602.48,3279.61 ; v1(2326.28,740.23) 2622.17,740.23 ; v1(2326.28,1645.75) 2622.17,1645.75 ; v1(2326.28,2551.26) 2622.17,2551.26 ; v1(2326.28,3456.77) 2622.17,3456.77 ; 2622.17,464.64 2290.85,464.64 ; 2622.17,1370.16 2290.85,1370.16 ; 2622.17,2275.67 2290.85,2275.67 ; 2622.17,3181.18 2290.85,3181.18 ; v1(1762.85,731.66) 1762.85,707.16 1857.1,612.91 ; v1(1762.85,1637.17) 1762.85,1612.68 1857.1,1518.42 ; v1(1762.85,2542.68) 1762.85,2518.19 1857.1,2423.94 ; v1(1762.85,3448.2) 1762.85,3423.7 1857.1,3329.45 ; 1857.1,612.91 2022.24,612.91 2070.6,612.91 2111.85,571.66 2219.83,571.66 2233.38,558.11 2233.38,516.66 2262.85,516.66 2290.85,488.66 2290.85,464.64 ; 1857.1,1518.42 2022.24,1518.42 2070.6,1518.42 2111.85,1477.17 2219.83,1477.17 2233.38,1463.62 2233.38,1422.17 2262.85,1422.17 2290.85,1394.17 2290.85,1370.16 ; 1857.1,2423.94 2022.24,2423.94 2070.6,2423.94 2111.85,2382.68 2219.83,2382.68 2233.38,2369.13 2233.38,2327.68 2262.85,2327.68 2290.85,2299.68 2290.85,2275.67 ; 1857.1,3329.45 2022.24,3329.45 2070.6,3329.45 2111.85,3288.2 2219.83,3288.2 2233.38,3274.65 2233.38,3233.2 2262.85,3233.2 2290.85,3205.2 2290.85,3181.18
  Bottom Layer w21.65: 320.85,608.66 618.28,608.66 630.85,621.23 ; 320.85,1514.17 618.28,1514.17 630.85,1526.74 ; 320.85,2419.68 618.28,2419.68 630.85,2432.25 ; 320.85,3325.2 618.28,3325.2 630.85,3337.76 ; 522.28,810.09 630.85,810.09 v1(722.42,810.09) ; 522.28,1715.61 630.85,1715.61 v1(722.42,1715.61) ; 522.28,2621.12 630.85,2621.12 v1(722.42,2621.12) ; 522.28,3526.63 630.85,3526.63 v1(722.42,3526.63) ; 522.42,410.23 630.85,410.23 1297.84,410.23 1397.85,510.23 ; 522.42,1315.74 630.85,1315.74 1297.84,1315.74 1397.85,1415.75 ; 522.42,2221.25 630.85,2221.25 1297.84,2221.25 1397.85,2321.26 ; 522.42,3126.76 630.85,3126.76 1297.84,3126.76 1397.85,3226.77 ; 630.85,481.09 630.85,621.23 ; 630.85,732.34 630.85,621.23 ; 630.85,1386.61 630.85,1526.74 ; 630.85,1637.85 630.85,1526.74 ; 630.85,2292.12 630.85,2432.25 ; 630.85,2543.36 630.85,2432.25 ; 630.85,3197.63 630.85,3337.76 ; 630.85,3448.87 630.85,3337.76 ; 838.85,692.09 935.84,692.09 ; 838.85,1597.61 935.84,1597.61 ; 838.85,2503.12 935.84,2503.12 ; 838.85,3408.63 935.84,3408.63 ; 935.32,707.61 935.32,784.22 935.32,816.69 962.29,843.66 1437.29,843.66 1461.85,868.22 1868.6,868.22 v1(1874.6,862.22) ; 935.32,1613.13 935.32,1689.73 935.32,1722.2 962.29,1749.17 1437.29,1749.17 1461.85,1773.73 1868.6,1773.73 v1(1874.6,1767.73) ; 935.32,2518.64 935.32,2595.24 935.32,2627.72 962.29,2654.68 1437.29,2654.68 1461.85,2679.24 1868.6,2679.24 v1(1874.6,2673.24) ; 935.32,3424.15 935.32,3500.76 935.32,3533.23 962.29,3560.2 1437.29,3560.2 1461.85,3584.76 1868.6,3584.76 v1(1874.6,3578.76) ; 994.38,784.22 1025.85,752.75 1025.85,692.09 ; 994.38,1689.73 1025.85,1658.26 1025.85,1597.61 ; 994.38,2595.24 1025.85,2563.77 1025.85,2503.12 ; 994.38,3500.76 1025.85,3469.28 1025.85,3408.63 ; 1217.85,692.09 1217.85,726.22 1276.29,784.66 1338.32,784.66 ; 1217.85,1597.61 1217.85,1631.73 1276.29,1690.17 1338.32,1690.17 ; 1217.85,2503.12 1217.85,2537.24 1276.29,2595.68 1338.32,2595.68 ; 1217.85,3408.63 1217.85,3442.76 1276.29,3501.2 1338.32,3501.2 ; 1308.85,692.09 1382.86,692.09 1397.85,707.09 1397.38,707.56 v1(1397.38,785.22) ; 1308.85,1597.61 1382.86,1597.61 1397.85,1612.6 1397.38,1613.07 v1(1397.38,1690.73) ; 1308.85,2503.12 1382.86,2503.12 1397.85,2518.11 1397.38,2518.58 v1(1397.38,2596.24) ; 1308.85,3408.63 1382.86,3408.63 1397.85,3423.62 1397.38,3424.09 v1(1397.38,3501.76) ; 1505.79,804.66 1505.79,766.72 1546.32,726.19 ; 1505.79,1710.17 1505.79,1672.23 1546.32,1631.7 ; 1505.79,2615.68 1505.79,2577.74 1546.32,2537.21 ; 1505.79,3521.2 1505.79,3483.25 1546.32,3442.72 ; v1(1580.85,726.19) 1546.32,726.19 ; v1(1580.85,1631.7) 1546.32,1631.7 ; v1(1580.85,2537.21) 1546.32,2537.21 ; v1(1580.85,3442.72) 1546.32,3442.72 ; 1623.91,804.66 1679.85,804.66 v1(1692.46,792.05) ; 1623.91,1710.17 1679.85,1710.17 v1(1692.46,1697.56) ; 1623.91,2615.68 1679.85,2615.68 v1(1692.46,2603.07) ; 1623.91,3521.2 1679.85,3521.2 v1(1692.46,3508.58) ; 1750.58,792.05 1750.58,743.93 v1(1762.85,731.66) ; 1750.58,1697.56 1750.58,1649.44 v1(1762.85,1637.17) ; 1750.58,2603.07 1750.58,2554.95 v1(1762.85,2542.68) ; 1750.58,3508.58 1750.58,3460.46 v1(1762.85,3448.2) ; 1770.32,340.66 1779.63,349.97 1779.63,456.17 1779.63,555.87 ; 1770.32,1246.17 1779.63,1255.48 1779.63,1361.68 1779.63,1461.39 ; 1770.32,2151.68 1779.63,2160.99 1779.63,2267.2 1779.63,2366.9 ; 1770.32,3057.2 1779.63,3066.5 1779.63,3172.71 1779.63,3272.41 ; 1809.64,792.05 1809.64,738.87 v1(1816.85,731.66) ; 1809.64,1697.56 1809.64,1644.38 v1(1816.85,1637.17) ; 1809.64,2603.07 1809.64,2549.9 v1(1816.85,2542.68) ; 1809.64,3508.58 1809.64,3455.41 v1(1816.85,3448.2) ; 1820.42,596.66 1779.63,555.87 ; 1820.42,1502.17 1779.63,1461.39 ; 1820.42,2407.68 1779.63,2366.9 ; 1820.42,3313.2 1779.63,3272.41 ; v1(1828.85,532.66) 1802.84,532.66 1779.63,555.87 ; v1(1828.85,1438.17) 1802.84,1438.17 1779.63,1461.39 ; v1(1828.85,2343.68) 1802.84,2343.68 1779.63,2366.9 ; v1(1828.85,3249.2) 1802.84,3249.2 1779.63,3272.41 ; v1(1829.38,340.66) 1886.32,340.66 ; v1(1829.38,1246.17) 1886.32,1246.17 ; v1(1829.38,2151.68) 1886.32,2151.68 ; v1(1829.38,3057.2) 1886.32,3057.2 ; v1(1887.85,533.66) 1919.94,533.66 1937.11,550.83 ; v1(1887.85,1439.17) 1919.94,1439.17 1937.11,1456.35 ; v1(1887.85,2344.68) 1919.94,2344.68 1937.11,2361.86 ; v1(1887.85,3250.2) 1919.94,3250.2 1937.11,3267.37 ; 1891.28,596.66 1937.11,550.83 ; 1891.28,1502.17 1937.11,1456.35 ; 1891.28,2407.68 1937.11,2361.86 ; 1891.28,3313.2 1937.11,3267.37 ; 1908.06,792.05 1908.06,736.45 v1(1910.85,733.66) ; 1908.06,1697.56 1908.06,1641.96 v1(1910.85,1639.17) ; 1908.06,2603.07 1908.06,2547.47 v1(1910.85,2544.68) ; 1908.06,3508.58 1908.06,3452.98 v1(1910.85,3450.2) ; 1945.38,340.66 1937.11,348.93 1937.11,456.17 1937.11,550.83 ; 1945.38,1246.17 1937.11,1254.44 1937.11,1361.68 1937.11,1456.35 ; 1945.38,2151.68 1937.11,2159.95 1937.11,2267.2 1937.11,2361.86 ; 1945.38,3057.2 1937.11,3065.46 1937.11,3172.71 1937.11,3267.37 ; v1(1950.85,655.66) 2049.85,556.66 ; v1(1950.85,1561.17) 2049.85,1462.17 ; v1(1950.85,2466.68) 2049.85,2367.68 ; v1(1950.85,3372.2) 2049.85,3273.2 ; v1(1957.85,733.66) 1967.12,742.93 1967.12,792.05 ; v1(1957.85,1639.17) 1967.12,1648.44 1967.12,1697.56 ; v1(1957.85,2544.68) 1967.12,2553.95 1967.12,2603.07 ; v1(1957.85,3450.2) 1967.12,3459.46 1967.12,3508.58 ; v1(2009.85,475.66) 2049.85,475.66 ; v1(2009.85,1381.17) 2049.85,1381.17 ; v1(2009.85,2286.68) 2049.85,2286.68 ; v1(2009.85,3192.2) 2049.85,3192.2 ; 2049.85,415.19 2049.85,475.66 ; 2049.85,1320.7 2049.85,1381.17 ; 2049.85,2226.21 2049.85,2286.68 ; 2049.85,3131.72 2049.85,3192.2 ; 2157.42,563.2 2150.87,556.66 2049.85,556.66 ; 2157.42,1468.72 2150.87,1462.17 2049.85,1462.17 ; 2157.42,2374.23 2150.87,2367.68 2049.85,2367.68 ; 2157.42,3279.74 2150.87,3273.2 2049.85,3273.2 ; v1(2201.28,428.66) 2233.85,428.66 2325.85,520.66 v1@2325.85,740.23 ; v1(2201.28,1334.17) 2233.85,1334.17 2325.85,1426.17 v1@2325.85,1645.75 ; v1(2201.28,2239.68) 2233.85,2239.68 2325.85,2331.68 v1@2325.85,2551.26 ; v1(2201.28,3145.2) 2233.85,3145.2 2325.85,3237.2 v1@2325.85,3456.77 ; 2228.28,563.2 2285.85,563.2 v1(2285.85,711.66) ; 2228.28,1468.72 2285.85,1468.72 v1(2285.85,1617.17) ; 2228.28,2374.23 2285.85,2374.23 v1(2285.85,2522.68) ; 2228.28,3279.74 2285.85,3279.74 v1(2285.85,3428.2) ; 630.85,621.23 838.85,621.23 1025.85,621.23 1217.85,621.23 1308.85,621.23 1441.36,621.23 1546.32,726.19 ; 630.85,1526.74 838.85,1526.74 1025.85,1526.74 1217.85,1526.74 1308.85,1526.74 1441.36,1526.74 1546.32,1631.7 ; 630.85,2432.25 838.85,2432.25 1025.85,2432.25 1217.85,2432.25 1308.85,2432.25 1441.36,2432.25 1546.32,2537.21 ; 630.85,3337.76 838.85,3337.76 1025.85,3337.76 1217.85,3337.76 1308.85,3337.76 1441.36,3337.76 1546.32,3442.72 ; 2049.85,475.66 2049.85,556.66 ; 2049.85,1381.17 2049.85,1462.17 ; 2049.85,2286.68 2049.85,2367.68 ; 2049.85,3192.2 2049.85,3273.2

## Polygon pours and split planes (outlines as drawn)
no net on Bottom Layer "Top Layer-No Net" (solid, pour order 9): 2362.85,3082.76 2362.85,3555.2 2816.85,3555.2 2816.85,3082.76
no net on Bottom Layer "Top Layer-No Net" (solid, pour order 9): 2362.85,2177.24 2362.85,2649.68 2816.85,2649.68 2816.85,2177.24
no net on Bottom Layer "Top Layer-No Net" (solid, pour order 9): 2362.85,1271.73 2362.85,1744.17 2816.85,1744.17 2816.85,1271.73
no net on Bottom Layer "Top Layer-No Net" (solid, pour order 9): 2362.85,366.22 2362.85,838.66 2816.85,838.66 2816.85,366.22

## Keep-outs
Keep-Out Layer:
  the board outline again, w1

## Silkscreen, mask and mechanical layers (free items; w line width, h text height)
Top Overlay:
  text "PCM2706 USB Audio Stick" at 757.85,3019.76 h40
  text "PCM2706 USB Audio Stick" at 757.85,2114.24 h40
  text "PCM2706 USB Audio Stick" at 757.85,1208.73 h40
  text "PCM2706 USB Audio Stick" at 757.85,303.22 h40
Bottom Overlay:
  text "Designed By Wayne" at 1510.85,3081.76 h40
  text "Designed By Wayne" at 1510.85,2176.24 h40
  text "Designed By Wayne" at 1510.85,1270.73 h40
  text "Designed By Wayne" at 1510.85,365.22 h40
Mechanical 1:
  drawing of 151 lines, arcs and shapes, not listed
  text "V cut" at 196.85,4094.49 h60
  text "V cut" at 2598.43,4094.49 h60
  text "Drill cut" at 855,3692 h27.56
  text "Drill cut" at 861,2919 h27.56
  text "Drill cut" at 862,2787 h27.56
  text "Drill cut" at 855,2013 h27.56
  text "Drill cut" at 858,1881 h27.56
  text "Drill cut" at 856,1109 h27.56
  text "Drill cut" at 860,975 h27.56
  text "Drill cut" at 878,202 h27.56
  text "V cut" at 2677.17,-236.22 h60
  text "V cut" at 157.48,-314.96 h60
Mechanical 13:
  lines w2: 196.85,286.22 ccw(c246.85,286.22) 246.85,236.22 2114.85,236.22 ccw(c2114.85,356.93) 2200.21,271.58 2259.5,330.87 cw(c2344.85,245.51) 2344.85,366.22 2816.85,366.22 2816.85,838.66 2344.85,838.66 cw(c2344.85,959.37) 2259.5,874.02 2200.21,933.31 ccw(c2114.85,847.95) 2114.85,968.66 246.85,968.66 ccw(c246.85,918.66) 196.85,918.66 196.85,286.22 ; 196.85,1191.73 ccw(c246.85,1191.73) 246.85,1141.73 2114.85,1141.73 ccw(c2114.85,1262.44) 2200.21,1177.09 2259.5,1236.38 cw(c2344.85,1151.02) 2344.85,1271.73 2816.85,1271.73 2816.85,1744.17 2344.85,1744.17 cw(c2344.85,1864.88) 2259.5,1779.53 2200.21,1838.82 ccw(c2114.85,1753.46) 2114.85,1874.17 246.85,1874.17 ccw(c246.85,1824.17) 196.85,1824.17 196.85,1191.73 ; 196.85,2097.24 ccw(c246.85,2097.24) 246.85,2047.24 2114.85,2047.24 ccw(c2114.85,2167.95) 2200.21,2082.6 2259.5,2141.89 cw(c2344.85,2056.53) 2344.85,2177.24 2816.85,2177.24 2816.85,2649.68 2344.85,2649.68 cw(c2344.85,2770.39) 2259.5,2685.04 2200.21,2744.33 ccw(c2114.85,2658.97) 2114.85,2779.68 246.85,2779.68 ccw(c246.85,2729.68) 196.85,2729.68 196.85,2097.24 ; 196.85,3002.76 ccw(c246.85,3002.76) 246.85,2952.76 2114.85,2952.76 ccw(c2114.85,3073.47) 2200.21,2988.11 2259.5,3047.4 cw(c2344.85,2962.05) 2344.85,3082.76 2816.85,3082.76 2816.85,3555.2 2344.85,3555.2 cw(c2344.85,3675.91) 2259.5,3590.55 2200.21,3649.84 ccw(c2114.85,3564.49) 2114.85,3685.2 246.85,3685.2 ccw(c246.85,3635.2) 196.85,3635.2 196.85,3002.76

## Text inside footprints (layer, text, board x,y; h text height)
"3.5 PhoneJack 5 Pin?": Top Overlay "L" at 630.85,778.66 h60 r180; Top Overlay "R" at 630.85,498.66 h60 r180
"3.5 PhoneJack 5 Pin?_1": Top Overlay "L" at 630.85,1684.17 h60 r180; Top Overlay "R" at 630.85,1404.17 h60 r180
"3.5 PhoneJack 5 Pin?_2": Top Overlay "L" at 630.85,2589.68 h60 r180; Top Overlay "R" at 630.85,2309.68 h60 r180
"3.5 PhoneJack 5 Pin?_3": Top Overlay "L" at 630.85,3495.2 h60 r180; Top Overlay "R" at 630.85,3215.2 h60 r180
C_coupling_L: Top Overlay "+" at 875.85,688.66 h60 r90
C_coupling_L_1: Top Overlay "+" at 875.85,1594.17 h60 r90
C_coupling_L_2: Top Overlay "+" at 875.85,2499.68 h60 r90
C_coupling_L_3: Top Overlay "+" at 875.85,3405.2 h60 r90
C_coupling_R: Top Overlay "+" at 1337.85,688.66 h60 r90
C_coupling_R_1: Top Overlay "+" at 1337.85,1594.17 h60 r90
C_coupling_R_2: Top Overlay "+" at 1337.85,2499.68 h60 r90
C_coupling_R_3: Top Overlay "+" at 1337.85,3405.2 h60 r90